# Altium PCB CR-10 Motherboard.PcbDoc (part 14 of 14)
Units mil, origin at the board's own origin, x right, y up, seen from the top; angles counter-clockwise.
Board outline 3970.48 x 2769.68 mil, 2 copper layers (TopLayer, BottomLayer); 147 components, 128 nets, 667 pads, 614 vias.
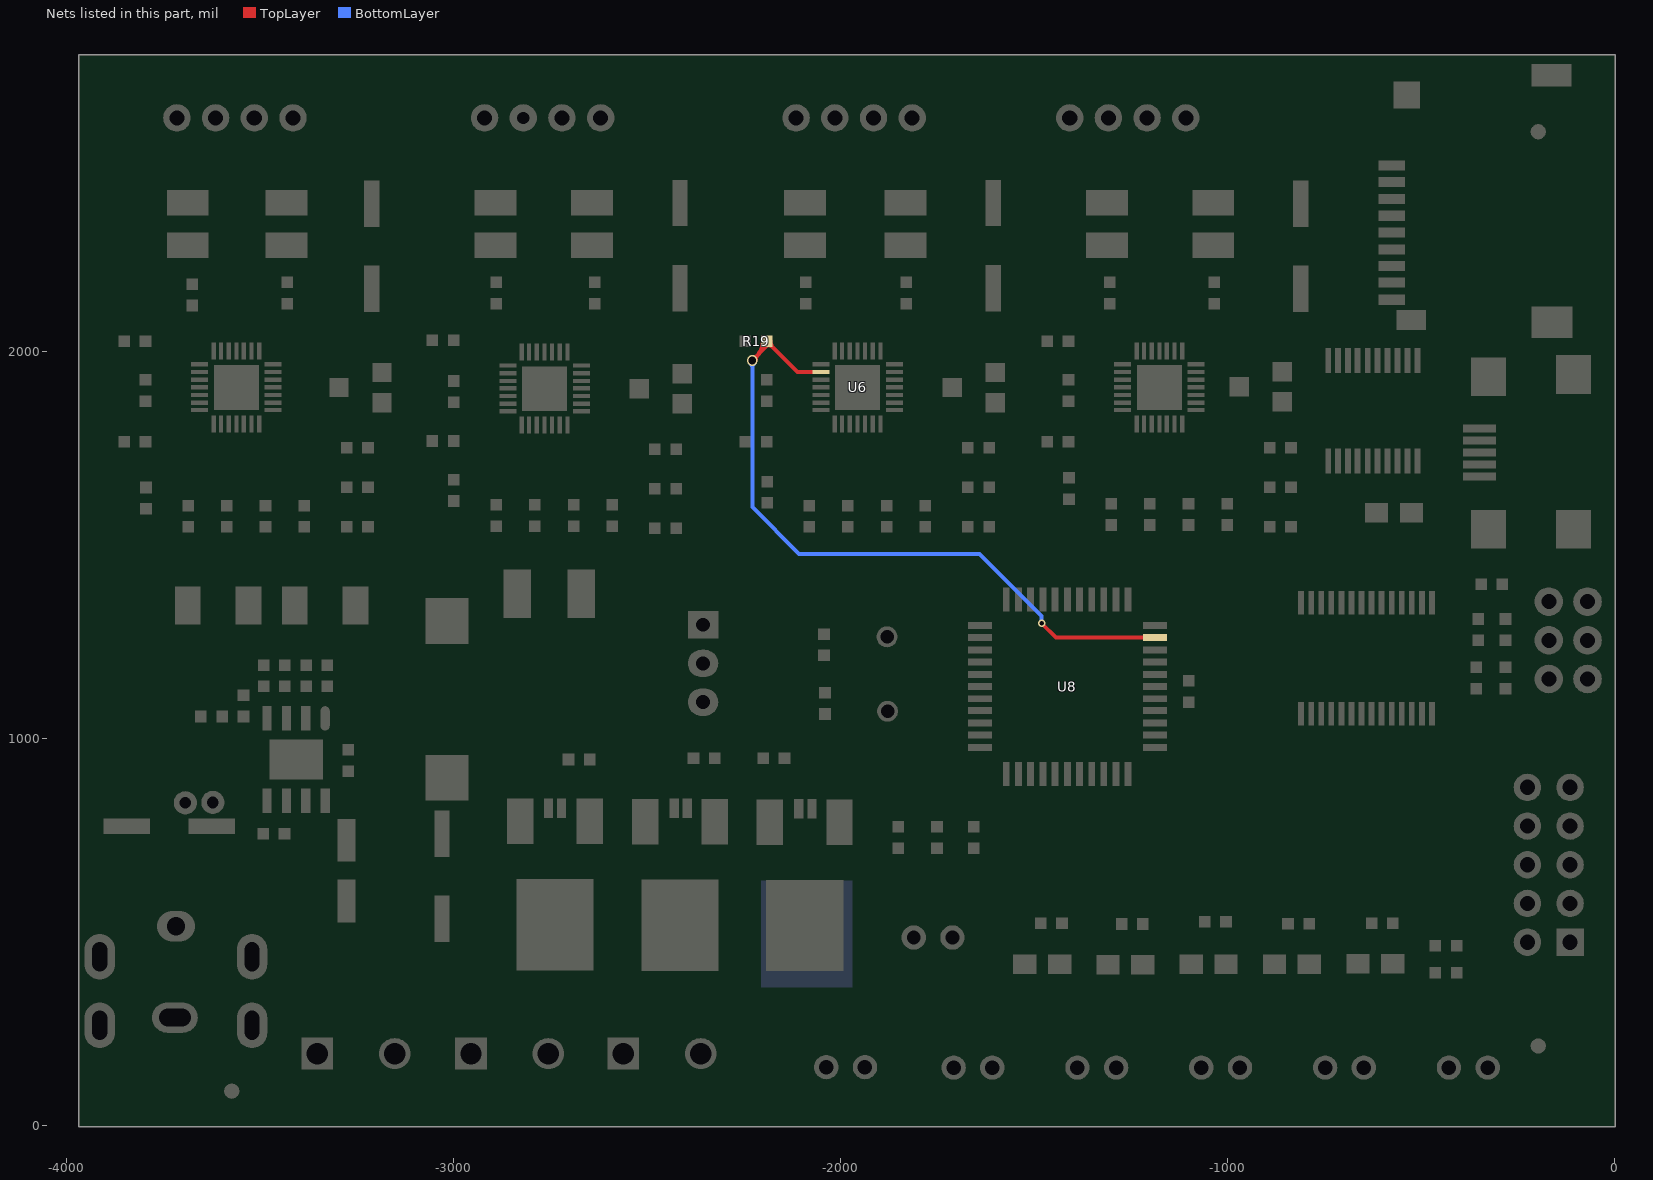
[diagram p14: the nets of this part, all layers, seen from the top]

## Via types
v1: diameter 28, hole 18, TopLayer to BottomLayer, tented both sides, 246 vias
v2: diameter 27.56, hole 19.68, TopLayer to BottomLayer, tented both sides, 196 vias
v3: diameter 20, hole 12, TopLayer to BottomLayer, tented both sides, 124 vias
v4: diameter 27.56, hole 11.81, TopLayer to BottomLayer, tented bottom, 16 vias
v5: diameter 27.56, hole 19.68, TopLayer to BottomLayer, 16 vias
v6: diameter 20, hole 12, TopLayer to BottomLayer, 12 vias
v7: diameter 28, hole 11.81, TopLayer to BottomLayer, tented both sides, 4 vias

## Nets (pads, with @x,y where several pads share a name; then routed paths per layer and width w, separated by ;. In a path a pad name is that pad's centre, name@x,y a point inside that pad or via, vN(x,y) a via of type N, cw(c..) or ccw(c..) an arc to the next point about the centre after c; other vN are vias at no path point) (continued)
ZENABLE: R19.1 U6.2 U8.32 | length 3458
  TopLayer w10: v2(-2227.54,1977.84) -2190.62,2014.76 R19.1@-2190.62,2027.88 ; U6.2@-2050.62,1947.88 -2110.62,1947.88 R19.1@-2190.62,2027.88 ; v3(-1480,1299) -1442.84,1261.84 U8.32@-1187.54,1261.84 ; v2@-2227.54,1986.62 ccw(c-2227.54,2007.82) -2212.55,1992.83 ; v2@-2227.54,1986.62 ccw(c-2227.54,2007.82) -2212.55,1992.83 ; v2@-2227.54,1986.62 ccw(c-2227.54,2007.82) -2212.55,1992.83 ; v2@-2227.54,1986.62 ccw(c-2227.54,2007.82) -2212.55,1992.83 ; v2@-2227.54,1986.62 ccw(c-2227.54,2007.82) -2212.55,1992.83 ; v2@-2227.54,1986.62 ccw(c-2227.54,2007.82) -2212.55,1992.83 ; v2@-2227.54,1986.62 ccw(c-2227.54,2007.82) -2212.55,1992.83 ; v2@-2227.54,1986.62 ccw(c-2227.54,2007.82) -2212.55,1992.83 ; v2@-2227.54,1986.62 ccw(c-2227.54,2007.82) -2212.55,1992.83 ; v2@-2218.76,1977.84 cw(c-2197.56,1977.84) -2212.55,1992.83 ; v2@-2218.76,1977.84 cw(c-2197.56,1977.84) -2212.55,1992.83 ; v2@-2218.76,1977.84 cw(c-2197.56,1977.84) -2212.55,1992.83 ; v2@-2218.76,1977.84 cw(c-2197.56,1977.84) -2212.55,1992.83 ; v2@-2218.76,1977.84 cw(c-2197.56,1977.84) -2212.55,1992.83 ; v2@-2218.76,1977.84 cw(c-2197.56,1977.84) -2212.55,1992.83 ; v2@-2218.76,1977.84 cw(c-2197.56,1977.84) -2212.55,1992.83 ; v2@-2218.76,1977.84 cw(c-2197.56,1977.84) -2212.55,1992.83 ; v2@-2218.76,1977.84 cw(c-2197.56,1977.84) -2212.55,1992.83 ; -2216.98,1988.4 ccw(c-2256.45,2027.88) R19.1@-2200.62,2027.88 ; -2216.98,1988.4 ccw(c-2256.45,2027.88) R19.1@-2200.62,2027.88 ; -2216.98,1988.4 ccw(c-2256.45,2027.88) R19.1@-2200.62,2027.88 ; -2216.98,1988.4 ccw(c-2256.45,2027.88) R19.1@-2200.62,2027.88 ; -2216.98,1988.4 ccw(c-2256.45,2027.88) R19.1@-2200.62,2027.88 ; -2216.98,1988.4 ccw(c-2256.45,2027.88) R19.1@-2200.62,2027.88 ; -2216.98,1988.4 ccw(c-2256.45,2027.88) R19.1@-2200.62,2027.88 ; -2216.98,1988.4 ccw(c-2256.45,2027.88) R19.1@-2200.62,2027.88 ; -2216.98,1988.4 ccw(c-2256.45,2027.88) R19.1@-2200.62,2027.88 ; -2199.9,2005.47 ccw(c-2222.31,2027.88) R19.1@-2190.62,2027.88 ; -2199.9,2005.47 ccw(c-2222.31,2027.88) R19.1@-2190.62,2027.88 ; -2199.9,2005.47 ccw(c-2222.31,2027.88) R19.1@-2190.62,2027.88 ; -2199.9,2005.47 ccw(c-2222.31,2027.88) R19.1@-2190.62,2027.88 ; -2199.9,2005.47 ccw(c-2222.31,2027.88) R19.1@-2190.62,2027.88 ; -2199.9,2005.47 ccw(c-2222.31,2027.88) R19.1@-2190.62,2027.88 ; -2199.9,2005.47 ccw(c-2222.31,2027.88) R19.1@-2190.62,2027.88 ; -2199.9,2005.47 ccw(c-2222.31,2027.88) R19.1@-2190.62,2027.88 ; -2199.9,2005.47 ccw(c-2222.31,2027.88) R19.1@-2190.62,2027.88 ; R19.1@-2190.62,2017.88 cw(c-2190.62,1993.74) -2173.55,2010.81 ; R19.1@-2190.62,2017.88 cw(c-2190.62,1993.74) -2173.55,2010.81 ; R19.1@-2190.62,2017.88 cw(c-2190.62,1993.74) -2173.55,2010.81 ; R19.1@-2190.62,2017.88 cw(c-2190.62,1993.74) -2173.55,2010.81 ; R19.1@-2190.62,2017.88 cw(c-2190.62,1993.74) -2173.55,2010.81 ; R19.1@-2190.62,2017.88 cw(c-2190.62,1993.74) -2173.55,2010.81 ; R19.1@-2190.62,2017.88 cw(c-2190.62,1993.74) -2173.55,2010.81 ; R19.1@-2190.62,2017.88 cw(c-2190.62,1993.74) -2173.55,2010.81 ; R19.1@-2190.62,2017.88 cw(c-2190.62,1993.74) -2173.55,2010.81 ; R19.1@-2180.62,2027.88 ccw(c-2156.48,2027.88) -2173.55,2010.81 ; R19.1@-2180.62,2027.88 ccw(c-2156.48,2027.88) -2173.55,2010.81 ; R19.1@-2180.62,2027.88 ccw(c-2156.48,2027.88) -2173.55,2010.81 ; R19.1@-2180.62,2027.88 ccw(c-2156.48,2027.88) -2173.55,2010.81 ; R19.1@-2180.62,2027.88 ccw(c-2156.48,2027.88) -2173.55,2010.81 ; R19.1@-2180.62,2027.88 ccw(c-2156.48,2027.88) -2173.55,2010.81 ; R19.1@-2180.62,2027.88 ccw(c-2156.48,2027.88) -2173.55,2010.81 ; R19.1@-2180.62,2027.88 ccw(c-2156.48,2027.88) -2173.55,2010.81 ; R19.1@-2180.62,2027.88 ccw(c-2156.48,2027.88) -2173.55,2010.81 ; -1219.19,1261.84 cw(c-1219.19,1252.19) U8.32@-1212.36,1259.01 ; -1219.19,1261.84 ccw(c-1219.19,1271.5) U8.32@-1212.36,1264.67 ; -1219.19,1261.84 cw(c-1219.19,1252.19) U8.32@-1212.36,1259.01 ; -1219.19,1261.84 ccw(c-1219.19,1271.5) U8.32@-1212.36,1264.67 ; -1219.19,1261.84 cw(c-1219.19,1252.19) U8.32@-1212.36,1259.01 ; -1219.19,1261.84 ccw(c-1219.19,1271.5) U8.32@-1212.36,1264.67 ; -1219.19,1261.84 ccw(c-1219.19,1271.5) U8.32@-1212.36,1264.67 ; -1219.19,1261.84 cw(c-1219.19,1252.19) U8.32@-1212.36,1259.01 ; -1219.19,1261.84 ccw(c-1219.19,1271.5) U8.32@-1212.36,1264.67 ; -1219.19,1261.84 cw(c-1219.19,1252.19) U8.32@-1212.36,1259.01 ; -1219.19,1261.84 ccw(c-1219.19,1271.5) U8.32@-1212.36,1264.67 ; -1219.19,1261.84 cw(c-1219.19,1252.19) U8.32@-1212.36,1259.01
  BottomLayer w10: v2(-2227.54,1977.84) -2227.54,1598.84 -2106.69,1478 -1640.69,1478 -1480,1317.31 v3(-1480,1299) ; v2@-2233.74,1971.63 cw(c-2248.73,1956.65) -2227.54,1956.65 ; v2@-2233.74,1971.63 cw(c-2248.73,1956.65) -2227.54,1956.65 ; v2@-2233.74,1971.63 cw(c-2248.73,1956.65) -2227.54,1956.65 ; v2@-2233.74,1971.63 cw(c-2248.73,1956.65) -2227.54,1956.65 ; v2@-2233.74,1971.63 cw(c-2248.73,1956.65) -2227.54,1956.65 ; v2@-2233.74,1971.63 cw(c-2248.73,1956.65) -2227.54,1956.65 ; v2@-2233.74,1971.63 cw(c-2248.73,1956.65) -2227.54,1956.65 ; v2@-2233.74,1971.63 cw(c-2248.73,1956.65) -2227.54,1956.65 ; v2@-2233.74,1971.63 cw(c-2248.73,1956.65) -2227.54,1956.65 ; -2227.54,1956.65 cw(c-2206.34,1956.65) v2@-2221.33,1971.63 ; -2227.54,1956.65 cw(c-2206.34,1956.65) v2@-2221.33,1971.63 ; -2227.54,1956.65 cw(c-2206.34,1956.65) v2@-2221.33,1971.63 ; -2227.54,1956.65 cw(c-2206.34,1956.65) v2@-2221.33,1971.63 ; -2227.54,1956.65 cw(c-2206.34,1956.65) v2@-2221.33,1971.63 ; -2227.54,1956.65 cw(c-2206.34,1956.65) v2@-2221.33,1971.63 ; -2227.54,1956.65 cw(c-2206.34,1956.65) v2@-2221.33,1971.63 ; -2227.54,1956.65 cw(c-2206.34,1956.65) v2@-2221.33,1971.63 ; -2227.54,1956.65 cw(c-2206.34,1956.65) v2@-2221.33,1971.63
pads on no net: Fid1. Fid2. Fid3. TF.1 TF.8 TF.9 U1.3 U1.6 U1.8 U1.9 U1.10 U1.11 U1.12 U1.13 U1.14 U1.19 U1.22 U1.23 U1.24 U1.27 U1.28 U2.6 U2.7 U2.8 U2.9 U2.11 U2.12 U2.13 U2.14 USB.0 USB.2

## Polygon pours and split planes (outlines as drawn)
no net on TopLayer "TopLayer-NetW1_2 1" (hatched 90Degree grid 3 track 10, remove dead copper, pour order 1018): -23010.54,-8963.16
GND on TopLayer "TopLayer-GND 1" (hatched 90Degree grid 3 track 10, pour order 1017): -23010.54,-8963.16
NetFAN1_1 on TopLayer "TopLayer-NetW3_2" (hatched 90Degree grid 3 track 10, remove dead copper, pour order 1019): -2235.54,641.84 -2235.54,378.84 -2190.54,333.84 -2190.54,278.84 -2156.54,244.84 -1993.54,244.84 -1980.54,231.84 -1980.54,115.84 -1965.54,100.84 -1893.54,100.84 -1875.54,118.84 -1875.54,353.84 -1965.54,443.84 -1965.54,639.84 -2235.54,639.84
VMOT on TopLayer "TopLayer-VMOT 1" (hatched 90Degree grid 3 track 10, remove dead copper, pour order 1014): -3516.54,609.84 -3329.04,609.84 -3329.04,544.84 ccw(c-3271.54,544.84) -3271.54,487.34 -3265.54,490.34 -3233.54,490.34 -3233.54,136.84 -3206.54,109.84 -3076.54,109.84 -3063.54,122.84 -3063.54,237.84 -3099.54,273.84 -3099.54,312.84 -3121.54,334.84 -3121.54,587.84 -3104.54,604.84 -2925.54,604.84 -2898.54,577.84 -2898.54,316.84 -2890.54,308.84 -2845.54,263.84 -2845.54,124.84 -2830.54,109.84 -2675.54,109.84 -2646.54,138.84 -2646.54,263.84 -2619.54,290.84 -2492.54,290.84 -2471.54,269.84 -2471.54,122.84 -2441.54,92.84 -2222.54,92.84 -2217.54,97.84 -2177.54,97.84 -2162.54,82.84 -1999.54,82.84 -1981.54,64.84 -1882.54,64.84 -1874.54,72.84 -1847.54,99.84 -1847.54,381.84 -1875.54,409.84 -1875.54,527.84 -1856.54,546.84 -1792.54,546.84 -1763.54,517.84 -1763.54,27.84 -1781.54,9.84 -3412.54,9.84 -3412.54,415.84 -3447.54,450.84 -3447.54,499.84 -3471.54,523.84 -3565.54,523.84 -3573.54,515.84 -3598.54,490.84 -3598.54,445.84 -3615.54,428.84 -3803.54,428.84 -3803.54,624.84 -3727.54,700.84 -3727.54,840.84 -3750.54,863.84 -3750.54,870.34 -3532.04,870.34 -3532.04,808.34 -3533.54,806.84 -3533.54,626.84
NetHotbed_1 on TopLayer "NETHOTBED_1_L01_P1016" (hatched 90Degree grid 3 track 10, remove dead copper, pour order 1016): -2857.54,417.84 -2857.54,341.84 -2811.54,295.84 -2811.54,145.97 -2801.54,135.97 -2703.54,135.97 -2684.66,154.84 -2684.66,282.84 -2608.54,358.97 -2608.54,635.84 -2857.54,635.84
NetHotend_1 on TopLayer "NETHOTEND_1_L01_P1015" (hatched 90Degree grid 3 track 10, remove dead copper, pour order 1015): -2532.54,449.84 -2532.54,349.84 -2513.54,330.84 -2469.54,330.84 -2433.54,294.84 -2433.54,138.97 -2418.41,123.84 -2283.54,123.84 -2261.54,145.84 -2261.54,334.84 -2282.54,355.84 -2282.54,642.84 -2533.54,642.84 -2533.54,431.84
GND on TopLayer "GND" (solid, remove dead copper, pour order 1021): -3966.54,2765.75 -3966.54,0 0,0 0,2764.84
NetFAN1_1 on BottomLayer "BottomLayer-NetW3_2 1" (hatched 90Degree grid 3 track 10, remove dead copper, pour order 1026): -1887.54,326.84 -1704.54,326.84 -1665.54,365.84 -1665.54,517.84 -1692.54,544.84 -1739.54,544.84 -1756.54,527.84 -1756.54,423.84 -1770.54,409.84 -1944.54,409.84 -1944.54,328.84 -1881.54,328.84
NetFAN1_1 on BottomLayer "BottomLayer-NetW3_2" (hatched 90Degree grid 3 track 10, remove dead copper, pour order 1024): -2235.54,631.84 -2235.54,378.84 -2191.54,334.84 -2191.54,279.84 -2157.54,245.84 -1997.54,245.84 -1981.54,229.84 -1981.54,116.84 -1966.54,101.84 -1893.54,101.84 -1872.54,122.84 -1872.54,347.84 -1966.54,441.84 -1966.54,633.84 -2236.54,633.84
GND on BottomLayer "BottomLayer-GND" (hatched 90Degree grid 3 track 10, remove dead copper, pour order 1020): -3806.54,385.84 -3606.54,385.84 -3585.54,406.84 -3462.54,406.84 -3448.54,392.84 -3448.54,8.84 -3967.54,8.84 -3967.54,1048.84 -3781.54,1048.84 -3781.54,838.84 -3763.54,820.84 -3763.54,715.84 -3837.54,641.84 -3837.54,383.84 -3802.54,383.84
VMOT on BottomLayer "BottomLayer-VMOT" (hatched 90Degree grid 3 track 10, remove dead copper, pour order 1025): -3522.54,608.84 -3331.04,608.84 -3331.04,544.84 ccw(c-3273.54,544.84) -3273.54,487.34 -3268.44,489.34 -3237.54,489.34 -3237.54,137.84 -3207.54,107.84 -3075.54,107.84 -3062.54,120.84 -3062.54,113.84 -3060.54,115.84 -3060.54,308.84 -2891.54,308.84 -2844.54,261.84 -2844.54,123.84 -2829.54,108.84 -2676.54,108.84 -2672.54,112.84 -2644.54,140.84 -2644.54,266.84 -2620.54,290.84 -2492.54,290.84 -2471.54,269.84 -2471.54,109.84 -2443.54,81.84 -2002.54,81.84 -1984.54,63.84 -1880.54,63.84 -1858.54,85.84 -1781.54,85.84 -1757.54,61.84 -1757.54,9.84 -3412.54,9.84 -3412.54,415.84 -3447.54,450.84 -3447.54,502.84 -3468.54,523.84 -3567.54,523.84 -3598.54,492.84 -3598.54,446.84 -3615.54,429.84 -3800.54,429.84 -3802.54,427.84 -3802.54,622.84 -3727.54,697.84 -3727.54,842.84 -3748.54,863.84 -3748.54,868.34 -3540.04,868.34 -3540.04,784.48 -3536.54,770.34 -3536.54,622.84
NetHotbed_1 on BottomLayer "NETHOTBED_1_L02_P1023" (hatched 90Degree grid 3 track 10, remove dead copper, pour order 1023): -2856.54,634.84 -2856.54,340.84 -2811.54,295.84 -2811.54,142.84 -2804.54,135.84 -2707.43,135.84 -2687.43,155.84 -2687.43,286.84 -2610.54,363.74 -2610.54,634.84
NetHotend_1 on BottomLayer "NETHOTEND_1_L02_P1022" (hatched 90Degree grid 3 track 10, remove dead copper, pour order 1022): -2532.54,451.84 -2532.54,350.84 -2513.54,331.84 -2464.54,331.84 -2431.54,298.84 -2431.54,141.84 -2415.54,125.84 -2287.54,125.84 -2267.54,145.84 -2267.54,338.84 -2283.54,354.84 -2283.54,643.84 -2531.54,643.84 -2531.54,452.84
GND on BottomLayer "GND" (solid, remove dead copper, pour order 1027): -3966.54,2765.75 -3966.54,0 0,0 0,2764.84

## Keep-outs
KeepOutLayer:
  circle w3.94: c-2614.54,1157.94 r69.69
  circle w3.94: c-716.54,2646.94 r69.69
  circle w3.94: c-99.54,100.94 r69.69
  circle w3.94: c-3163.54,2638.94 r69.69
  circle w3.94: c-3866.54,1261.94 r68.9
  circle w10: c-3717.24,145.76 r39.37
  circle w3.94: c-142.25,2197.84 r19.68
  circle w3.94: c-142.25,2513.84 r19.68
  circle w3.94: c-228.25,1828.84 r19.68
  circle w3.94: c-228.25,1646.84 r19.68
  lines w3.94: 0,2764.84 0,9.84 0,0 -6.54,0 -29.54,0 -3966.54,0 -3966.54,9.84 -3966.54,2765.75 -29.54,2765.75 0,2765.75

## Other copper
TopLayer:
  region net VMOT: -1777.54,509.84 -1777.54,535.79 -1794.53,535.79 -1794.53,509.84
  region net VMOT: -1771,501.84 -1771,519.84 -1788.53,519.84 -1788.53,501.84
  region net VMOT: -1784.54,501.84 -1784.54,533.4 -1788.53,533.4 -1788.53,501.84
  region net VMOT: -1784.54,501.84 -1784.54,537.86 -1803.54,537.86 -1803.54,501.84
  region net VMOT: -1759.54,487.84 -1759.54,509.84 -1820.54,509.84 -1820.54,487.84
  region net VMOT: -1759.54,440.77 -1759.54,487.84 -1833.54,487.84 -1833.54,440.77
  region net VMOT: -1801.54,432.84 -1801.54,534.84 -1860.54,534.84 -1860.54,432.84
  region net VMOT: -2023.54,129.84 -2023.54,176.84 -2206.54,176.84 -2206.54,129.84
  region net VMOT: -2137.54,39.84 -2137.54,87.84 -2241.54,87.84 -2241.54,39.84
  region net NetFAN1_1: -1961.54,111.5 -1961.54,122.84 -1968.54,122.84 -1968.54,111.5
  region net NetFAN1_1: -1937.54,95.84 -1937.54,122.84 -1961.54,122.84 -1961.54,95.84
  region net NetFAN1_1: -1899.54,95.84 -1899.54,116.03 -1937.54,116.03 -1937.54,95.84
  region net NetFAN1_1: -1890.54,171.84 -1890.54,200.84 -1985.54,200.84 -1985.54,171.84
  region net NetFAN1_1: -1889.54,114.84 -1889.54,171.84 -1985.54,171.84 -1985.54,114.84
  region net GND: -3630.54,208.84 -3630.54,285.84 -3798.4,285.84 -3798.4,208.84
  region net VMOT: -2023.54,168.84 -2080.54,168.84 -2080.54,129.84 -2023.54,129.84
  region net GND: -747.54,2290.84 -747.54,2479.84 -868.54,2479.84 -868.54,2290.84
  region net GND: -2491.1,752.84 -2491.1,824.28 -2579.54,824.28 -2579.54,752.84
  region net GND: -2480.54,691.84 -2480.54,905.84 -2525.54,905.84 -2525.54,691.84
  region net VMOT: -3016.54,432.84 -3016.54,591.84 -3086.54,591.84 -3086.54,432.84
  region net VMOT: -3257.54,129.84 -3257.54,277.84 -3407.54,277.84 -3407.54,129.84
  region net GND: -356.54,1174.06 -356.54,1193.84 -382.32,1193.84 -382.32,1174.06
  region net GND: -466.54,2034.84 -466.54,2085.84 -596.54,2085.84 -596.54,2034.84
  region net GND: -283.54,1802.84 -283.54,1834.84 -413.54,1834.84 -413.54,1802.84
  region net GND: -511.54,1519.84 -511.54,1645.84 -536.54,1645.84 -536.54,1519.84
  region net VMOT: -2497.49,95.97 -2497.49,266.97 -2617.49,266.97 -2617.49,95.97
  region net VMOT: -2866.54,101.84 -2866.54,255.84 -3033.54,255.84 -3033.54,101.84
  region net GND: -1979.54,1113.84 -1979.54,1218.84 -2102.54,1218.84 -2102.54,1113.84
  region net GND: -1311.41,2166.84 -1311.41,2218.84 -1346.54,2218.84 -1346.54,2166.84
  region net GND: -2380.54,1529.84 -2380.54,1558.84 -2413.54,1558.84 -2413.54,1529.84
  region net GND: -1581.54,1649.88 -1581.54,1699.84 -1615.62,1699.84 -1615.62,1649.88
  region net GND: -1562.54,2285.84 -1562.54,2473.84 -1655.54,2473.84 -1655.54,2285.84
  region net GND: -828.55,1543.84 -828.55,1642.81 -846.54,1642.81 -846.54,1543.84
  region net GND: -808.54,1815.84 -808.54,1882.84 -902.54,1882.84 -902.54,1815.84
  region net GND: -767.54,2288.84 -767.54,2324.84 -854.54,2324.84 -854.54,2288.84
  region net GND: -965.54,2329.84 -965.54,2438.84 -1115.54,2438.84 -1115.54,2329.84
  region net GND: -995.54,2179.84 -995.54,2215.84 -1034.54,2215.84 -1034.54,2179.84
  region net GND: -1409.45,1585.84 -1409.45,1619.8 -1456.54,1619.8 -1456.54,1585.84
  region net GND: -1584.54,1813.84 -1584.54,1873.84 -1651.54,1873.84 -1651.54,1813.84
  region net GND: -2089.54,2179.84 -2089.54,2209.84 -2133.54,2209.84 -2133.54,2179.84
  region net GND: -2017.54,2333.84 -2017.54,2440.84 -2168.54,2440.84 -2168.54,2333.84
  region net GND: -1757.54,2331.84 -1757.54,2450.84 -1876.54,2450.84 -1876.54,2331.84
  region net GND: -1785.54,2179.84 -1785.54,2212.84 -1829.54,2212.84 -1829.54,2179.84
  region net GND: -2129.54,1589.84 -2129.54,1622.84 -2237.54,1622.84 -2237.54,1589.84
  region net GND: -2952.54,1561.84 -2952.54,1612.84 -3045.54,1612.84 -3045.54,1561.84
  region net GND: -2408.54,1808.84 -2408.54,1865.84 -2465.54,1865.84 -2465.54,1808.84
  region net GND: -2350.54,2296.84 -2350.54,2479.84 -2464.54,2479.84 -2464.54,2296.84
  region net GND: -2567.54,2328.84 -2567.54,2453.84 -2687.54,2453.84 -2687.54,2328.84
  region net GND: -2582.54,2178.84 -2582.54,2210.84 -2643.54,2210.84 -2643.54,2178.84
  region net GND: -2891.54,2174.84 -2891.54,2214.84 -2936.54,2214.84 -2936.54,2174.84
  region net GND: -2817.54,2330.84 -2817.54,2443.84 -2966.54,2443.84 -2966.54,2330.84
  region net GND: -3152.54,2296.84 -3152.54,2471.84 -3264.54,2471.84 -3264.54,2296.84
  region net GND: -3168.54,1810.84 -3168.54,1867.84 -3238.54,1867.84 -3238.54,1810.84
  region net GND: -3383.54,2179.84 -3383.54,2213.84 -3441.54,2213.84 -3441.54,2179.84
  region net GND: -3362.54,2332.84 -3362.54,2443.84 -3503.54,2443.84 -3503.54,2332.84
  region net GND: -3681.54,2335.84 -3681.54,2438.84 -3769.54,2438.84 -3769.54,2335.84
  region net GND: -3676.54,2173.84 -3676.54,2209.84 -3721.54,2209.84 -3721.54,2173.84
  region net GND: -3742.54,1570.84 -3742.54,1594.84 -3843.54,1594.84 -3843.54,1570.84
  region net GND: -3182.54,1501.84 -3182.54,1703.84 -3225.54,1703.84 -3225.54,1501.84
  region net GND: -2393.54,1646.84 -2393.54,1681.84 -2424.54,1681.84 -2424.54,1646.84
  region net GND: -637.54,353.84 -637.54,471.84 -689.54,471.84 -689.54,353.84
  region net GND: -1065.54,350.84 -1065.54,480.84 -1128.54,480.84 -1128.54,350.84
  region net GND: -849.54,356.84 -849.54,483.84 -920.54,483.84 -920.54,356.84
  region net GND: -1279.54,346.84 -1279.54,468.84 -1348.54,468.84 -1348.54,346.84
  region net GND: -1512.54,346.84 -1512.54,469.84 -1583.54,469.84 -1583.54,346.84
  region net GND: -1600.54,670.84 -1600.54,724.84 -1917.54,724.84 -1917.54,670.84
  region net GND: -1989.54,1312.84 -1989.54,1366.84 -2108.54,1366.84 -2108.54,1312.84
  region net GND: -2199.54,901.84 -2199.54,1010.84 -2241.54,1010.84 -2241.54,901.84
  region net GND: -2381.54,900.84 -2381.54,1000.84 -2429.54,1000.84 -2429.54,900.84
  region net GND: -2697.54,889.84 -2697.54,976.84 -2751.54,976.84 -2751.54,889.84
  region net GND: -2151.54,701.84 -2151.54,863.84 -2246.54,863.84 -2246.54,701.84
  region net GND: -2797.54,700.84 -2797.54,876.84 -2885.54,876.84 -2885.54,700.84
  region net NetS8_1: -1080.54,2087.08 -1080.54,2309.84 -1105.29,2309.84 -1105.29,2087.08
  region net NetS4_1: -2676.54,2080.85 -2676.54,2267.84 -2690.53,2267.84 -2690.53,2080.85
  region net NetS1_1: -3616.54,2076.69 -3616.54,2315.84 -3627.39,2315.84 -3627.39,2076.69
  region net NetS2_1: -3469.54,2085.11 -3469.54,2308.84 -3493.27,2308.84 -3493.27,2085.11
  region net NetS3_1: -2826.54,2058.84 -2826.54,2307.84 -2838.54,2307.84 -2838.54,2058.84
  region net NetS6_1: -1855.54,2080.84 -1855.54,2311.84 -1884.54,2311.84 -1884.54,2080.84
  region net NetS7_1: -1235.54,2079.84 -1235.54,2308.84 -1259.54,2308.84 -1259.54,2079.84
  region net NetS8_1: -1080.54,2099.84 -1080.54,2309.84 -1103.54,2309.84 -1103.54,2099.84
  region net NetS8_1: -1080.54,2099.84 -1080.54,2309.84 -1092.54,2309.84 -1092.54,2099.84
  region net NetS7_1: -1243.54,2079.84 -1243.54,2309.84 -1259.54,2309.84 -1259.54,2079.84
  region net NetS6_1: -1863.54,2080.84 -1863.54,2309.84 -1884.54,2309.84 -1884.54,2080.84
  region net NetS5_1: -2016.54,2082.84 -2016.54,2311.84 -2037.54,2311.84 -2037.54,2082.84
  region net NetS3_1: -2818.54,2058.84 -2818.54,2308.84 -2838.54,2308.84 -2838.54,2058.84
  region net NetS4_1: -2680.54,2079.84 -2680.54,2306.84 -2700.54,2306.84 -2700.54,2079.84
  region net NetS1_1: -3619.54,2075.84 -3619.54,2307.84 -3632.54,2307.84 -3632.54,2075.84
  region net NetS6_1: -1870.54,2080.84 -1870.54,2268.84 -1884.54,2268.84 -1884.54,2080.84
  region net NetS5_1: -2023.54,2082.84 -2023.54,2305.84 -2037.54,2305.84 -2037.54,2082.84
  region net VMOT: -3176.54,2094.84 -3176.54,2232.84 -3241.54,2232.84 -3241.54,2094.84
  region net VMOT: -2380.54,2092.84 -2380.54,2244.84 -2450.54,2244.84 -2450.54,2092.84
  region net VMOT: -1574.54,2096.84 -1574.54,2237.84 -1634.54,2237.84 -1634.54,2096.84
  region net VMOT: -774.54,2088.84 -774.54,2229.84 -849.54,2229.84 -849.54,2088.84
  region net GND: -1355.54,66.84 -1355.54,216.84 -1498.54,216.84 -1498.54,66.84
  region net GND: -1034.54,67.84 -1034.54,230.84 -1163.54,230.84 -1163.54,67.84
  region net GND: -711.54,75.84 -711.54,220.84 -845.54,220.84 -845.54,75.84
  region net GND: -393.54,72.84 -393.54,221.84 -541.54,221.84 -541.54,72.84
  region net GND: -1898.02,2530.84 -1898.02,2530.84 -1898.02,2530.84 -1898.02,2530.84
  region net GND: -143.54,2618.84 -143.54,2683.84 -180.54,2683.84 -180.54,2618.84
  region net GND: -47.54,2662.84 -47.54,2700.84 -267.54,2700.84 -267.54,2662.84
  region net GND: -47.54,2063.84 -47.54,2091.84 -266.54,2091.84 -266.54,2063.84
  region net GND: -133.54,2008.84 -133.54,2152.84 -183.54,2152.84 -183.54,2008.84
  region net GND: -517.54,2578.84 -517.54,2734.84 -559.54,2734.84 -559.54,2578.84
  region net GND: -454.54,2642.84 -454.54,2680.84 -620.54,2680.84 -620.54,2642.84
  region net GND: -2824.54,2424.84 -2824.54,2545.84 -2975.54,2545.84 -2975.54,2424.84
  region net GND: -2561.54,2438.84 -2561.54,2553.84 -2696.54,2553.84 -2696.54,2438.84
  region net GND: -2015.54,2430.84 -2015.54,2549.42 -2171.54,2549.42 -2171.54,2430.84
  region net GND: -1754.54,2443.84 -1754.54,2499.84 -1896.54,2499.84 -1896.54,2443.84
  region net GND: -1749.57,2489.84 -1749.57,2520.84 -1895.54,2520.84 -1895.54,2489.84
  region net GND: -1755.75,2510.84 -1755.75,2530.84 -1889.54,2530.84 -1889.54,2510.84
  region net GND: -1759.69,2521.84 -1759.69,2539.84 -1881.54,2539.84 -1881.54,2521.84
  region net GND: -1243.54,2440.84 -1243.54,2475.84 -1319.54,2475.84 -1319.54,2440.84
  region net GND: -1327.54,2432.84 -1327.54,2506.84 -1390.04,2506.84 -1390.04,2432.84
  region net GND: -1279.54,2452.84 -1279.54,2509.84 -1314.54,2509.84 -1314.54,2452.84
  region net GND: -1235.54,2408.84 -1235.54,2444.84 -1385.54,2444.84 -1385.54,2408.84
  region net GND: -1237.54,2328.84 -1237.54,2431.84 -1385.54,2431.84 -1385.54,2328.84
  region net GND: -1020.54,2435.84 -1020.54,2488.84 -1118.54,2488.84 -1118.54,2435.84
  region net GND: -3621.54,2443.84 -3621.54,2542.84 -3772.54,2542.84 -3772.54,2443.84
  region net GND: -3715.54,2427.84 -3715.54,2469.84 -3760.54,2469.84 -3760.54,2427.84
  region net GND: -3359.54,2431.84 -3359.54,2543.84 -3494.54,2543.84 -3494.54,2431.84
  region net NetFAN1_1: -1971.54,378.84 -1971.54,639.84 -2222.54,639.84 -2222.54,378.84
  region net VMOT: -2988.54,273.84 -2988.54,594.84 -3099.54,594.84 -3099.54,273.84
  region net VMOT: -2924.54,141.84 -2924.54,382.84 -3036.54,382.84 -3036.54,141.84
  region net GND: -3772.54,720.84 -3772.54,842.84 -3892.54,842.84 -3892.54,720.84
  region net GND: -171.54,443.84 -171.54,496.84 -291.54,496.84 -291.54,443.84
  region net GND: -194.54,399.84 -194.54,474.84 -257.54,474.84 -257.54,399.84
  region net GND: -462.54,383.84 -462.54,409.84 -510.54,409.84 -510.54,383.84
  region net GND: -452.54,348.84 -452.54,430.84 -474.54,430.84 -474.54,348.84
  region net GND: -45.54,1075.84 -45.54,1156.84 -94.54,1156.84 -94.54,1075.84
  region net GND: -321.54,1177.84 -321.54,1203.84 -393.54,1203.84 -393.54,1177.84
  region net GND: -348.54,1184.84 -348.54,1219.84 -370.54,1219.84 -370.54,1184.84
  region net GND: -281.54,1243.84 -281.54,1266.84 -316.54,1266.84 -316.54,1243.84
  region net GND: -264.54,1219.84 -264.54,1254.84 -297.54,1254.84 -297.54,1219.84
  region net GND: -1134.54,1132.84 -1134.54,1143.84 -1173.54,1143.84 -1173.54,1132.84
  region net VMOT: -3639.54,452.84 -3639.54,585.84 -3791.54,585.84 -3791.54,452.84
  region net GND: -3849.24,128.84 -3849.24,364.84 -3949.24,364.84 -3949.24,128.84
  region net GND: -3848.24,364.84 -3848.24,630.84 -3949.24,630.84 -3949.24,364.84
  region net GND: -3864.54,630.84 -3864.54,1142.84 -3949.24,1142.84 -3949.24,630.84
  region net GND: -3630.54,229.84 -3630.54,345.84 -3818.54,345.84 -3818.54,229.84
  region net GND: -3465.54,142.84 -3465.54,419.1 -3594.54,419.1 -3594.54,142.84
  region net GND: -3138.54,161.84 -3138.54,214.84 -3202.54,214.84 -3202.54,161.84
  region net GND: -3143.54,214.84 -3143.54,297.84 -3202.54,297.84 -3202.54,214.84
  region net GND: -1688.54,94.84 -1688.54,203.84 -1725.54,203.84 -1725.54,94.84
  rectangle net VMOT: -2226.54,45.84 -2156.54,174.84
  rectangle net VMOT: -3735.54,729.84 -3541.54,867.84
  rectangle net GND: -781,1705 -735,1738
  rectangle net GND: -508.54,1704 -481,1729
  rectangle net GND: -517,1657 -497,1777.84
  region net NetCP1_2: -3334.54,1020.84 -3309.54,1020.84 -3286.54,997.84 -3286.54,956.84 -3148.54,956.84 -2959.54,1145.84 -2959.54,1364.84 -3090.54,1364.84 -3152.54,1302.84 -3190,1280 -3454,1280 -3517,1346 -3543.54,1358.84 -3543.54,1319.84 -3470.54,1246.84 -3288.54,1246.84 -3236.54,1194.84 -3236.54,1127.84 -3272.54,1091.84 -3335.54,1091.84 -3346.54,1080.84 -3346.54,1032.84
BottomLayer:
  region net GND: -3855.54,128.84 -3855.54,1142.84 -3949.24,1142.84 -3949.24,128.84
  region net GND: -3105.54,193.84 -3105.54,265.84 -3144.54,265.84 -3144.54,193.84
  region net NetFAN1_1: -1683.54,512.84 -1683.54,537.85 -1746.53,537.85 -1746.53,512.84
  region net NetFAN1_1: -1665.54,511.88 -1665.54,520.84 -1686.54,520.84 -1686.54,511.88
  region net NetFAN1_1: -1662.54,502.84 -1662.54,512.84 -1683.54,512.84 -1683.54,502.84
  region net NetFAN1_1: -1676.91,502.84 -1676.91,525.84 -1761.54,525.84 -1761.54,502.84
  region net NetFAN1_1: -1752.39,456.84 -1752.39,470.84 -1760.53,470.84 -1760.53,456.84
  region net NetFAN1_1: -1662.53,439.84 -1662.53,470.84 -1755.54,470.84 -1755.54,439.84
  region net NetFAN1_1: -1662.54,470.84 -1662.54,488.84 -1760.53,488.84 -1760.53,470.84
  region net NetFAN1_1: -1662.54,486.84 -1662.54,502.84 -1761.54,502.84 -1761.54,486.84
  region net NetFAN1_1: -1662.54,486.84 -1662.54,488.84 -1760.54,488.84 -1760.54,486.84
  region net NetFAN1_1: -1942.54,96.84 -1942.54,120.84 -1967.54,120.84 -1967.54,96.84
  region net NetFAN1_1: -1895.42,96.84 -1895.42,120.84 -1942.54,120.84 -1942.54,96.84
  region net NetFAN1_1: -1884.54,167.84 -1884.54,199.84 -1985.54,199.84 -1985.54,167.84
  region net NetFAN1_1: -1885.54,117.84 -1885.54,167.84 -1985.54,167.84 -1985.54,117.84
  region net GND: -3570.53,387.84 -3570.53,406.84 -3589.54,406.84 -3589.54,387.84
  region net GND: -3462.54,347.84 -3462.54,406.84 -3570.54,406.84 -3570.54,347.84
  region net GND: -3140.73,212.84 -3140.73,246.04 -3203.54,246.04 -3203.54,212.84
  region net GND: -3108.54,148.84 -3108.54,212.84 -3203.54,212.84 -3203.54,148.84
  region net VMOT: -3276.54,125.84 -3276.54,289.84 -3407.54,289.84 -3407.54,125.84
  region net VMOT: -2499.49,88.97 -2499.49,261.97 -2623.49,261.97 -2623.49,88.97
  region net VMOT: -2872.54,87.17 -2872.54,266.17 -3032.54,266.17 -3032.54,87.17
  region net VMOT: -775.54,2089.84 -775.54,2227.84 -848.54,2227.84 -848.54,2089.84
  region net VMOT: -2043.54,2003.84 -2043.54,2179.84 -2102.54,2179.84 -2102.54,2003.84
  region net VMOT: -3176.54,2094.84 -3176.54,2231.84 -3241.54,2231.84 -3241.54,2094.84
  region net VMOT: -2381.54,2092.84 -2381.54,2244.84 -2450.54,2244.84 -2450.54,2092.84
  region net VMOT: -1575.54,2096.84 -1575.54,2236.84 -1634.54,2236.84 -1634.54,2096.84
  region net VMOT: -772.54,2137.84 -772.54,2179.84 -3701.54,2179.84 -3701.54,2137.84
  region net VMOT: -3648.54,1990.84 -3648.54,2179.84 -3701.54,2179.84 -3701.54,1990.84
  region net VMOT: -3398.54,1997.84 -3398.54,2177.84 -3455.54,2177.84 -3455.54,1997.84
  region net VMOT: -2862.54,2005.84 -2862.54,2177.84 -2915.54,2177.84 -2915.54,2005.84
  region net VMOT: -2607.54,2022.84 -2607.54,2178.84 -2662.54,2178.84 -2662.54,2022.84
  region net VMOT: -1801.54,2009.84 -1801.54,2179.84 -1855.54,2179.84 -1855.54,2009.84
  region net VMOT: -1275.54,2012.84 -1275.54,2178.84 -1337.54,2178.84 -1337.54,2012.84
  region net VMOT: -1003.54,2022.84 -1003.54,2177.84 -1064.54,2177.84 -1064.54,2022.84
  region net GND: -1084.54,1822.84 -1084.54,1993.84 -1270.54,1993.84 -1270.54,1822.84
  region net GND: -1865.54,1813.84 -1865.54,1987.84 -2044.54,1987.84 -2044.54,1813.84
  region net GND: -2659.54,1816.84 -2659.54,1987.84 -2860.54,1987.84 -2860.54,1816.84
  region net GND: -3476.54,1813.84 -3476.54,1968.84 -3657.54,1968.84 -3657.54,1813.84
  region net GND: -3479.54,1946.84 -3479.54,1990.84 -3629.54,1990.84 -3629.54,1946.84
  region net GND: -1361.54,62.84 -1361.54,228.84 -1503.54,228.84 -1503.54,62.84
  region net GND: -1032.54,54.84 -1032.54,256.84 -1174.54,256.84 -1174.54,54.84
  region net GND: -710.54,62.84 -710.54,253.84 -848.54,253.84 -848.54,62.84
  region net GND: -408.54,58.84 -408.54,225.84 -528.54,225.84 -528.54,58.84
  region net NetHotbed_1: -2638.54,403.84 -2638.54,630.84 -2836.54,630.84 -2836.54,403.84
  region net NetFAN1_1: -1995.54,403.84 -1995.54,631.84 -2196.54,631.84 -2196.54,403.84
  region net GND: -3338.54,2431.84 -3338.54,2542.84 -3530.54,2542.84 -3530.54,2431.84
  region net GND: -3602.54,2424.84 -3602.54,2548.84 -3809.54,2548.84 -3809.54,2424.84
  region net GND: -45.54,1076.84 -45.54,1148.84 -94.54,1148.84 -94.54,1076.84
  region net GND: -174.8,450.84 -174.8,493.84 -294.54,493.84 -294.54,450.84
  region net GND: -192.54,420.34 -192.54,474.84 -257.54,474.84 -257.54,420.34
  region net VMOT: -3640.54,453.84 -3640.54,589.84 -3774.54,589.84 -3774.54,453.84
  region net VMOT: -3753.54,472.84 -3753.54,570.84 -3787.54,570.84 -3787.54,472.84
  region net GND: -1688.54,83.84 -1688.54,215.84 -1725.54,215.84 -1725.54,83.84
  rectangle net VMOT: -3735.54,780.84 -3543.54,868.34
  rectangle net GND: -2445,1171 -2293,1195

## Silkscreen, mask and mechanical layers (free items; w line width, h text height)
TopOverlay:
  lines w5: -3514.54,1260.84 -3405.54,1215.84 ; -439.13,1026.51 -391.54,1139.84 ; -420.54,1393.84 -386.54,1294.84 ; -3714.54,1159.84 ccw(c-3701.54,1159.84) -3701.54,1146.84 -3579.54,1146.84 -3522.54,1146.84 ccw(c-3522.54,1154.84) -3514.54,1154.84 -3514.54,1276.84 ccw(c-3523.48,1276.84) -3523.48,1285.79 -3705.54,1285.79 ccw(c-3705.54,1276.79) -3714.54,1276.79 -3714.54,1159.84 ; -486.54,1393.84 -486.54,1495.84 -392.54,1495.84 -392.54,1393.84 -486.54,1393.84 ; -475.54,889.84 -398.54,889.84 -373.54,889.84 -373.54,1025.84 -475.54,1025.84 -475.54,889.84
  lines w8: -442.54,392.84 -428.54,378.84 ; -442.54,393.84 -429.54,406.84
  lines w10: -2259.49,64.21 -2258.49,65.21 ; -293.54,1163.84 -279.54,1149.84 -267.54,1161.84 ; -3914.09,23.72 -3520.39,23.72 -3520.39,555.21 -3914.09,555.21 -3914.09,23.72
  text "X" at -3829.54,2561.84 h200
  text "Y" at -2487.54,2561.84 h200
  text "Z" at -1685.54,2561.84 h200
  text "E" at -973.54,2561.84 h200
  text "S   G   V" at -2473,1071 h80 r90
  text "Creality3D V1.1.2" at -1544.54,705.84 h150
  text "-" at -1682.54,597.84 h100
  text "+" at -1894.54,592.84 h100
  text "GND" at -3210.54,430.84 h35
  text "+12V" at -3420.54,428.84 h35
  text "+12V" at -3021.54,381.84 h31.5
  text "BED" at -2792.54,381.84 h31.5
  text "+12V" at -2618.54,381.84 h31.5
  text "HOT-END" at -2452.54,379.84 h31.5
  text "-" at -1908.54,262.84 h100
  text "+" at -2120.54,257.84 h100
BottomOverlay:
  text "+12V" at -2879.54,294.84 h39.37
  text "BED" at -2716.54,294.84 h39.37
  text "+12V" at -2498.54,294.84 h39.37
  text "HOT-END" at -2170.54,294.84 h39.37
  text "002" at -3542.54,80.84 h60
  text "C-00003-O-A-06" at -3521.54,22.84 h60